# EAGLE board Or (EAGLE 9.7.0)

Size 216.1 x 39.84 mm. Coordinates in mm from the lower left corner, seen from the top.
Outline: 0,0 216.1,0 216.1,39.84 0,39.84 0,0
Copper layers (1*16): Top 0.035mm / dielectric 1.5mm / Bottom 0.035mm
Design rules "default": minimum track width 6mil, minimum drill 0.35mm, track to track 6mil, track to pad 6mil, pad to pad 6mil, via to via 6mil, smd to smd 6mil, copper to edge 40mil, drill to drill 6mil, minimum pad ring 10mil, minimum via ring 8mil, stop-mask expansion 4mil, vias tented up to drill 0mil, thermal gap 10mil

## Footprints (pad centres in the part's own frame; a part is rotated, then mirrored left to right if it is on the bottom)
BATTERY-GENERIC = drill 1.118 pad 3.15 octagon: + 2.54,0; - -2.54,0
LEDRD254W60D565H860B = drill 0.981 pad 1.581: 1 -1.27,0; 2 1.27,0
RESAD1016W63L850D250B = drill 0.83 pad 1.43: 1 -5.08,0; 2 5.08,0
78B04ST = drill 0.8: 1 -3.81,-3.81; 2 -1.27,-3.81; 3 1.27,-3.81; 4 3.81,-3.81; 5 3.81,3.81; 6 1.27,3.81; 7 -1.27,3.81; 8 -3.81,3.81
DIP762W53P254L1969H508Q14B = drill 0.743 pad 1.343: 1 -3.81,7.62; 2 -3.81,5.08; 3 -3.81,2.54; 4 -3.81,0; 5 -3.81,-2.54; 6 -3.81,-5.08; 7 -3.81,-7.62; 8 3.81,-7.62; 9 3.81,-5.08; 10 3.81,-2.54; 11 3.81,0; 12 3.81,2.54; 13 3.81,5.08; 14 3.81,7.62

## Placement (x,y rotation side)
BAT1  4.5V  [BATTERY-GENERIC]  8.26,31.59 270 top
D1  RED  [LEDRD254W60D565H860B]  210.04,15.88 180 top
D2  RED  [LEDRD254W60D565H860B]  202.42,15.88 180 top
D3  RED  [LEDRD254W60D565H860B]  194.8,15.88 180 top
D4  RED  [LEDRD254W60D565H860B]  187.18,15.88 180 top
R1  1k  [RESAD1016W63L850D250B]  206.23,28.57 90 top
R2  1k  [RESAD1016W63L850D250B]  201.15,28.57 90 top
R3  1k  [RESAD1016W63L850D250B]  190.99,28.57 90 top
R4  1k  [RESAD1016W63L850D250B]  185.91,28.57 90 top
SW1  SPST-478B04ST  [78B04ST]  55.1,9.53 0 top
SW2  SPST-478B04ST  [78B04ST]  67.8,9.53 0 top
U1  74HC32_PDIP  [DIP762W53P254L1969H508Q14B]  89.39,9.53 90 top

## Library data of the parts
BAT1 R1-R4 SW1 SW2 U1 = Tinkercad
D1-D4 = Tinkercad; CATEGORY: Opto-Electronic; SUB-CATEGORY: LED; VALUE: LED_RED

## Nets
BAT1+: BAT1.+ SW1.5 SW1.6 SW1.7 SW1.8 SW2.5 SW2.6 SW2.7 SW2.8 U1.14
BAT1-: BAT1.- R1.2 R2.2 R3.2 R4.2 U1.7
D1_C: D1.2 R1.1
D2_C: D2.2 R2.1
D3_C: D3.2 R3.1
D4_C: D4.2 R4.1
U1_1A: SW1.1 U1.1
U1_1B: SW2.1 U1.2
U1_1Y: D4.1 U1.3
U1_2A: SW1.2 U1.4
U1_2B: SW2.2 U1.5
U1_2Y: D3.1 U1.6
U1_3A: SW1.4 U1.9
U1_3B: SW2.4 U1.10
U1_3Y: D1.1 U1.8
U1_4A: SW1.3 U1.12
U1_4B: SW2.3 U1.13
U1_4Y: D2.1 U1.11

## Tracks (layer width: path | path; a pad name or v marks a point on that pad's centre or on a via)
BAT1+  (9 unrouted)
BAT1-  (5 unrouted)
D1_C  (1 unrouted)
D2_C  (1 unrouted)
D3_C  (1 unrouted)
D4_C  (1 unrouted)
U1_1A  (1 unrouted)
U1_1B  (1 unrouted)
U1_1Y  (1 unrouted)
U1_2A  (1 unrouted)
U1_2B  (1 unrouted)
U1_2Y  (1 unrouted)
U1_3A  (1 unrouted)
U1_3B  (1 unrouted)
U1_3Y  (1 unrouted)
U1_4A  (1 unrouted)
U1_4B  (1 unrouted)
U1_4Y  (1 unrouted)